# Altium PCB FPGA_Rack_v1_0.PcbDoc (part 3 of 5)
Units mil, origin at the board's own origin, x right, y up, seen from the top; angles counter-clockwise.
Board outline 6299.21 x 3937.01 mil, 8 copper layers (Top Layer, Top, Internal Plane 2, Vcc 3.3V, Internal Plane 1, Gnd, Mid-Layer 1, SIG1, Mid-Layer 2, SIG3, Mid-Layer 3, SIG2, Mid-Layer 4, SIG4, Bottom Layer, Bottom), stack 74.2 mil thick; 215 components, 379 nets, 1713 pads, 1076 vias.
Unrouted connection lines stored in the file: 1.
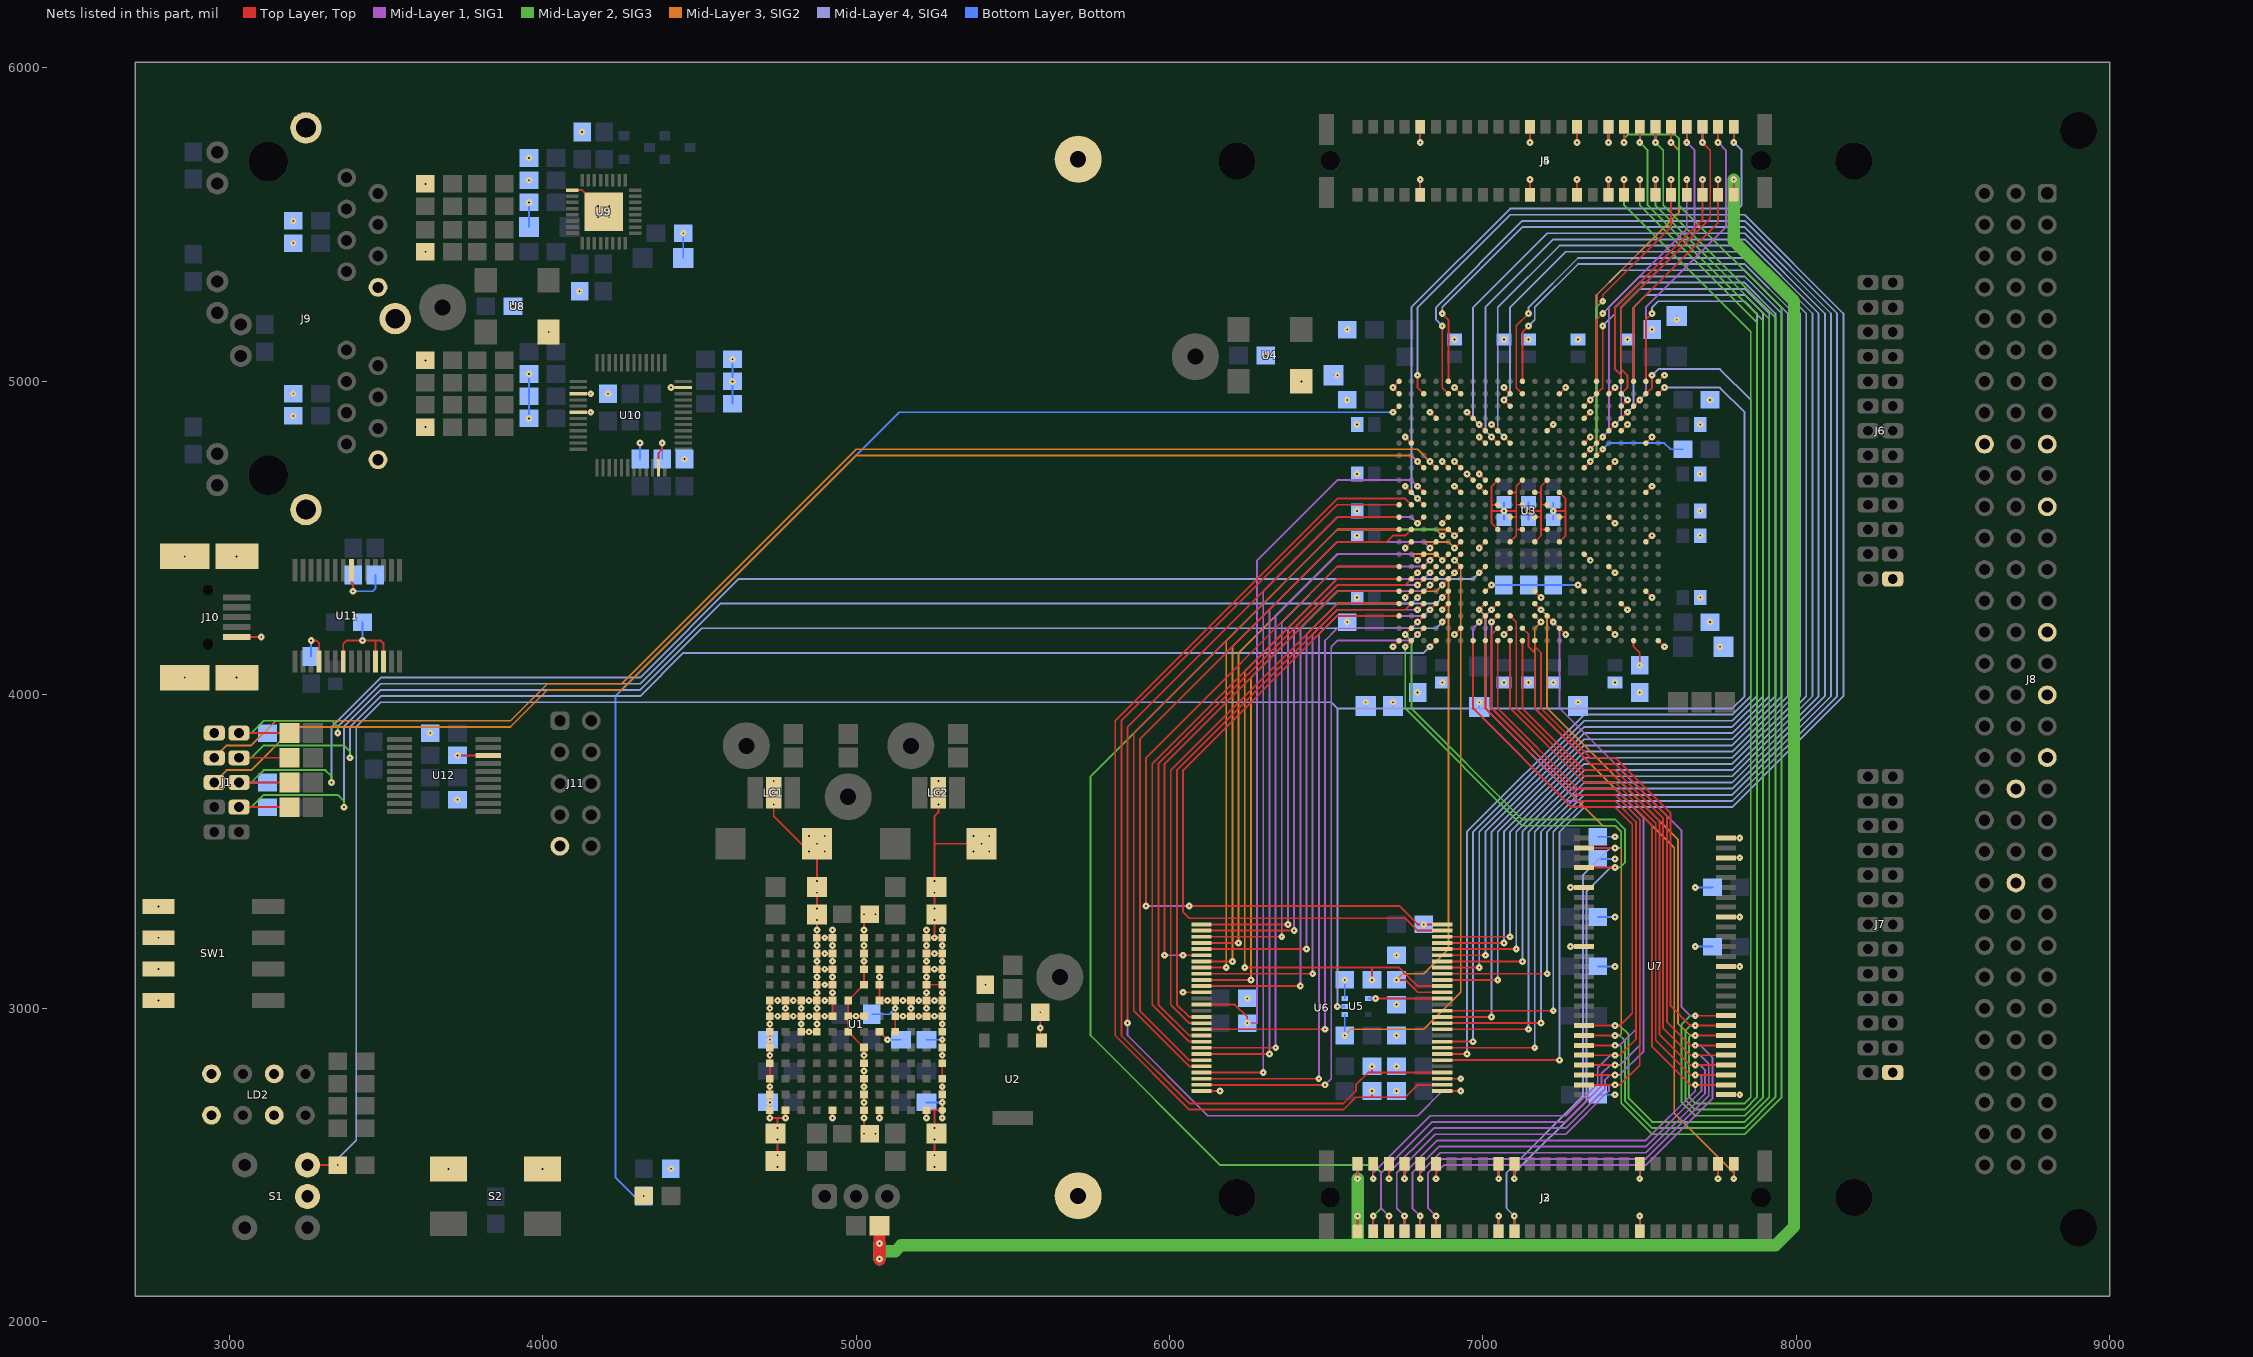
[diagram p9: the nets of this part, all layers, seen from the top]

## Via types
v1: diameter 21.65, hole 5.91, Top Layer, Top to Bottom Layer, Bottom, 1076 vias

## Nets (pads, with @x,y where several pads share a name; then routed paths per layer and width w, separated by ;. In a path a pad name is that pad's centre, name@x,y a point inside that pad or via, vN(x,y) a via of type N, cw(c..) or ccw(c..) an arc to the next point about the centre after c; other vN are vias at no path point) (continued)
FB2: R5.2 U1.54 | length 79.1
  Top Layer, Top w5.91: U1.54@5075,2925 v1(5100,2900)
  Bottom Layer, Bottom w5.91: v1(5100,2900) R5.2@5143.75,2900
FLASH_ADV_N: R23.2 U3.G20 U6.46 | length 2348.1
  Top Layer, Top w5.91: v1(6240.16,3129.92) 6645.67,3129.92 ; v1(6645.67,3090.55) 6645.67,3129.92 ; v1(6791.34,4389.76) U3.G20@6811.02,4409.45 ; U6.46@6870.08,3070.87 6791.34,3070.87 6732.28,3129.92 6645.67,3129.92
  Mid-Layer 3, SIG2 w5.91: v1(6240.16,3129.92) 6240.16,4074.8 6535.43,4370.08 6771.65,4370.08 v1(6791.34,4389.76)
FLASH_CE_N: R22.1 U3.M21 U6.30 | length 3444
  Top Layer, Top w5.91: v1(6645.67,2736.22) 6645.67,2716.54 ; U3.M21@6771.65,4606.3 6751.97,4625.98 6535.43,4625.98 5826.77,3917.32 5826.77,2913.39 6062.99,2677.17 6555.12,2677.17 6594.49,2716.54 6645.67,2716.54 ; U6.30@6870.08,2755.91 6791.34,2755.91 6751.97,2716.54 6645.67,2716.54
FLASH_CLK: R26.1 U3.G17 U6.45 | length 1604.9
  Top Layer, Top w5.91: v1(6724.41,3090.55) 6751.97,3090.55 6791.34,3051.18 U6.45@6870.08,3051.18 ; v1(6909.45,4389.76) U3.G17@6929.13,4409.45
  Mid-Layer 3, SIG2 w5.91: v1(6724.41,3090.55) 6744.09,3110.24 6811.02,3110.24 6889.76,3188.98 6889.76,4370.08 v1(6909.45,4389.76)
FLASH_FPGA_RESET_N: R21.1 U3.H17 U5.1 | length 1908
  Top Layer, Top w5.91: v1(6909.45,4429.13) U3.H17@6929.13,4448.82
  Mid-Layer 3, SIG2 w5.91: v1(6559.06,2913.39) 6578.74,2933.07 6811.02,2933.07 6929.13,3051.18 6929.13,4409.45 v1(6909.45,4429.13)
  Bottom Layer, Bottom w5.91: v1(6559.06,2913.39) U5.1@6559.06,2980.32
FLASH_OE_N: R24.1 U3.M22 U6.32 | length 3360.4
  Top Layer, Top w5.91: v1(6645.67,2814.96) 6645.67,2795.28 ; U3.M22@6732.28,4606.3 6535.43,4606.3 5846.46,3917.32 5846.46,2913.39 6062.99,2696.85 6555.12,2696.85 6594.49,2736.22 6594.49,2755.91 6633.86,2795.28 6645.67,2795.28 ; U6.32@6870.08,2795.28 6645.67,2795.28
FLASH_RST_N: U5.4 U6.44 | length 236.2
  Top Layer, Top w5.91: v1(6657.48,3031.5) U6.44@6870.08,3031.5
  Bottom Layer, Bottom w5.91: U5.4@6633.86,3031.5 v1(6657.48,3031.5)
FLASH_WAIT: R27.1 U3.G22 U6.56 | length 2501.6
  Top Layer, Top w5.91: v1(5925.2,3326.77) 5925.2,3799.21 6535.43,4409.45 U3.G22@6732.28,4409.45 ; v1(6062.99,3326.77) 6732.28,3326.77 6791.34,3267.72 v1(6811.02,3267.72) U6.56@6870.08,3267.72
  Mid-Layer 1, SIG1 w5.91: v1(5925.2,3326.77) v1(6062.99,3326.77)
FLASH_WE_N: R25.1 U3.N20 U6.14 | length 2343.3
  Top Layer, Top w5.91: U6.14@6102.36,3011.81 6208.66,3011.81 6248.03,2972.44 v1(6248.03,2952.76) ; v1(6791.34,4665.35) U3.N20@6811.02,4645.67
  Mid-Layer 1, SIG1 w5.91: v1(6248.03,2952.76) 6279.53,2952.76 6279.53,4429.13 6535.43,4685.04 6771.65,4685.04 v1(6791.34,4665.35)
FPGA_DONE: LD1.2 R13.2 U3.Y22 | length 4533.7
  Top Layer, Top w5.91: v1(6712.6,4901.57) U3.Y22@6732.28,4921.26
  Bottom Layer, Bottom w5.91: v1(4322.83,2401.57) 4291.34,2401.57 4232.28,2460.63 4232.28,3996.06 5137.8,4901.57 v1(6712.6,4901.57)
FPGA_INIT_B: R9.2 U3.T6 | length 300.1
  Top Layer, Top w5.91: U3.T6@7362.2,4763.78 v1(7381.89,4783.46)
  Bottom Layer, Bottom w5.91: v1(7381.89,4783.46) 7401.57,4803.15 7578.74,4803.15 7598.43,4783.46 R9.2@7637.8,4783.46
FPGA_JTAG_TCK: J1.5 JP9.2 R11.1 U3.G15 | length 4661.5
  Top Layer, Top w5.91: J1.5@3031.5,3720.47 JP9.2@3192.72,3720.47 ; v1(6988.19,4389.76) U3.G15@7007.87,4409.45
  Mid-Layer 2, SIG3 w5.91: J1.5@3031.5,3720.47 3070.87,3720.47 3110.24,3759.84 3307.09,3759.84 3326.77,3740.16 v1(3326.77,3720.47)
  Mid-Layer 4, SIG4 w5.91: v1(3326.77,3720.47) 3326.77,3897.64 3484.25,4055.12 4311.02,4055.12 4625.98,4370.08 6968.5,4370.08 v1(6988.19,4389.76)
  Bottom Layer, Bottom w5.91: J1.5@3031.5,3720.47 R11.1@3122.05,3720.47
FPGA_JTAG_TDI: J1.9 JP11.2 R12.1 U3.E18 | length 4353.3
  Top Layer, Top w5.91: J1.9@3031.5,3877.95 JP11.2@3192.72,3877.95 ; v1(6870.08,4311.02) U3.E18@6889.76,4330.71
  Mid-Layer 2, SIG3 w5.91: J1.9@3031.5,3877.95 3070.87,3877.95 3110.24,3917.32 3326.77,3917.32 3346.46,3897.64 v1(3346.46,3877.95)
  Mid-Layer 4, SIG4 w5.91: v1(3346.46,3877.95) 3346.46,3897.64 3484.25,4035.43 4311.02,4035.43 4566.93,4291.34 6850.39,4291.34 v1(6870.08,4311.02)
  Bottom Layer, Bottom w5.91: J1.9@3031.5,3877.95 R12.1@3122.05,3877.95
FPGA_JTAG_TDO: J1.7 JP10.2 U3.A19 | length 4236.8
  Top Layer, Top w5.91: J1.7@3031.5,3799.21 JP10.2@3192.72,3799.21 ; v1(6830.71,4153.54) U3.A19@6850.39,4173.23
  Mid-Layer 2, SIG3 w5.91: J1.7@3031.5,3799.21 3070.87,3799.21 3110.24,3838.58 3366.14,3838.58 3385.83,3818.9 v1(3385.83,3799.21)
  Mid-Layer 4, SIG4 w5.91: v1(3385.83,3799.21) 3385.83,3897.64 3484.25,3996.06 4311.02,3996.06 4448.82,4133.86 6811.02,4133.86 v1(6830.71,4153.54)
FPGA_JTAG_TMS: J1.3 JP8.2 R10.1 U3.C18 | length 4556.9
  Top Layer, Top w5.91: J1.3@3031.5,3641.73 JP8.2@3192.72,3641.73 ; v1(6870.08,4232.28) U3.C18@6889.76,4251.97
  Mid-Layer 2, SIG3 w5.91: J1.3@3031.5,3641.73 3070.87,3641.73 3110.24,3681.1 3346.46,3681.1 3366.14,3661.42 v1(3366.14,3641.73)
  Mid-Layer 4, SIG4 w5.91: v1(3366.14,3641.73) 3366.14,3897.64 3484.25,4015.75 4311.02,4015.75 4507.87,4212.6 6850.39,4212.6 v1(6870.08,4232.28)
  Bottom Layer, Bottom w5.91: J1.3@3031.5,3641.73 R10.1@3122.05,3641.73
GND: C1.1 C2.1 C3.1 C4.1 C5.1 C6.1 C7.1 C8.1 C9.1 C10.1 C11.1 C12.1 C13.1 C14.1 C15.MINUS C16.MINUS C17.1 C18.1 C19.1 C20.1 C21.1 C22.1 C23.1 C24.1 C25.1 C26.1 C27.1 C28.1 C29.1 C30.1 C31.1 C32.1 C33.1 C34.1 C35.1 C36.1 C37.1 C38.1 C39.1 C40.1 C41.1 C42.1 C43.1 C44.1 C45.1 C46.1 C47.1 C48.1 C49.1 C50.1 C51.1 C52.1 C53.1 C54.1 C55.1 C56.1 C57.1 C58.1 C59.1 C60.1 C61.1 C62.1 C63.1 C64.1 C65.1 C66.1 C67.1 C68.1 C69.1 C70.1 C71.1 C72.1 C73.1 C74.1 C75.1 C76.2 C77.2 C78.1 C79.1 C80.1 C81.2 C82.1 C83.1 C84.2 C85.2 C86.1 C87.1 C88.1 C89.2 C90.2 C91.1 C92.1 C93.1 C94.2 C95.2 C96.1 C97.1 C98.1 C99.1 C100.1 C101.1 C102.1 C105.2 C106.2 C107.1 J1.10 J2.a10 J2.a19 J2.b10 J2.b19 J2.b24 J3.a10 J3.a19 J3.b10 J3.b19 J3.b24 J4.a5 J4.a12 J4.a15 J4.a17 J4.b5 J4.b12 J4.b15 J4.b17 J5.a5 J5.a12 J5.a15 J5.a17 J5.b5 J5.b12 J5.b15 J5.b17 J6.26 J7.26 J8.9a J8.9c J8.11a J8.15a J8.17a J8.19a J8.20b J8.23b J9.8 J9.20 J9.25 J9.26 J9.27 J10.5 J10.6 J10.7 J10.8 J10.9 J11.9 LC1.2 LC2.2 LD2.2 LD2.4 LD2.6 LD2.8 PT1.1 PT6.1 R1.1 R5.1 R6.1 R7.1 R14.2 R23.1 R39.1 R48.1 S1.C S2.1 S2.2 SW1.1 SW1.2 SW1.3 SW1.4 U1.1 U1.2 U1.3 U1.4 U1.5 U1.6 U1.7 U1.8 U1.9 U1.10 U1.11 U1.12 U1.13 U1.19 U1.20 U1.21 U1.22 U1.23 U1.24 U1.31 U1.32 U1.42 U1.43 U1.44 U1.49 U1.56 U1.57 U1.58 U1.61 U1.62 U1.63 U1.64 U1.65 U1.67 U1.69 U1.70 U1.71 U1.72 U1.78 U1.79 U1.80 U1.85 U1.91 U1.92 U1.93 U1.94 U1.95 U1.96 U1.102 U1.103 U1.104 U1.105 U1.106 U1.107 U1.108 U1.114 U1.115 U1.116 U1.121 U1.127 U1.128 U1.133 U1.134 U1.135 U1.136 U1.137 U1.138 U1.139 U1.140 U2.2 U3.A1 U3.A22 U3.AA5 U3.AA9 U3.AA13 U3.AA17 U3.AA22 U3.AB1 U3.AB22 U3.B5 U3.B9 U3.B13 U3.B17 U3.D4 U3.D18 U3.E2 U3.E7 U3.E11 U3.E15 U3.E21 U3.G5 U3.G18 U3.H7 U3.J2 U3.J9 U3.J11 U3.J13 U3.J15 U3.J21 U3.K10 U3.K12 U3.K14 U3.L5 U3.L9 U3.L11 U3.L13 U3.L18 U3.M10 U3.M12 U3.M14 U3.N2 U3.N9 U3.N11 U3.N13 U3.N15 U3.N17 U3.N21 U3.P10 U3.P12 U3.P14 U3.P15 U3.P16 U3.R5 U3.R17 U3.R18 U3.U2 U3.U7 U3.U15 U3.U21 U3.V4 U3.V10 U3.V14 U3.W7 U3.W16 U3.W19 U4.2 U5.3 U6.12 U6.28 U6.31 U7.6 U7.12 U7.28 U7.41 U7.46 U7.52 U7.54 U8.2 U9.1 U9.33 U10.15 U10.18 U10.35 U10.47 U11.7 U11.18 U11.21 U11.25 U11.26 U12.18 | length 13745.6
  Top Layer, Top w5.91: J10.7@2858.27,4054.13 v1(2858.27,4055.12) ; v1(2858.27,4440.94) J10.9@2858.27,4441.93 ; v1(3023.62,4055.12) 3024.61,4054.13 J10.6@3025.59,4054.13 ; v1(3023.62,4440.94) 3024.61,4441.93 J10.8@3025.59,4441.93 ; J10.5@3024.61,4185.04 v1(3102.36,4185.04) ; v1(3261.81,4173.23) 3279.53,4173.23 3287.4,4165.35 U11.18@3287.4,4106.3 ; U11.21@3364.17,4106.3 3364.17,4163.39 3374.02,4173.23 v1(3425.2,4173.23) 3466.54,4173.23 ; U11.7@3389.76,4397.64 3389.76,4358.27 3395.67,4352.36 v1(3395.67,4330.71) ; U11.25@3466.54,4106.3 3466.54,4173.23 ; U11.26@3492.13,4106.3 3492.13,4165.35 3484.25,4173.23 3466.54,4173.23 ; v1(3728.35,3807.09) U12.18@3826.77,3807.09 ; U8.2@4018.9,5157.48 v1(4019.68,5157.48) ; U9.1@4094.49,5610.24 4125.98,5610.24 v1(4177.17,5559.06) U9.33@4194.88,5541.34 ; U10.18@4114.17,4901.57 v1(4153.54,4901.57) ; U10.15@4114.17,4960.63 v1(4153.54,4960.63) ; v1(4177.17,5523.62) U9.33@4194.88,5541.34 ; v1(4212.6,5523.62) U9.33@4194.88,5541.34 ; v1(4212.6,5559.06) U9.33@4194.88,5541.34 ; U10.35@4370.08,4724.41 4370.08,4771.65 4381.89,4783.46 v1(4381.89,4803.15) ; v1(4409.45,4980.31) U10.47@4448.82,4980.31 ; v1(4737.5,3725) v1(4737.5,3687.5) v1(4737.5,3650) 4737.5,3612.5 4825,3525 ; C1.1@4743.75,2512.5 C1.1@4750,2512.5 ; C4.1@4743.75,2600 C4.1@4750,2600 ; v1(4750,2493.75) C1.1@4750,2512.5 ; U1.121@4775,2675 v1(4775,2650) 4750,2650 ; v1(4850,3550) v1(4875,3525) ; v1(4900,3500) v1(4875,3525) ; v1(4900,3550) v1(4875,3525) ; v1(4925,2650) U1.85@4925,2675 ; v1(4925,3250) U1.96@4925,3225 ; U1.67@5025,2975 v1(5000,2975) U1.79@4975,2975 ; v1(5062.5,2600) C3.1@5043.75,2600 v1(5025,2600) v1(5025,2650) U1.61@5025,2675 v1(5025,2700) U1.62@5025,2725 v1(5025,2750) U1.63@5025,2775 v1(5025,2800) U1.64@5025,2825 v1(5025,2850) U1.65@5025,2875 U1.78@4975,2925 U1.79@4975,2975 ; v1(5062.5,3300) C10.1@5043.75,3300 v1(5025,3300) v1(5025,3250) U1.72@5025,3225 v1(5025,3200) U1.71@5025,3175 v1(5025,3150) U1.70@5025,3125 U1.69@5025,3075 U1.80@4975,3025 U1.79@4975,2975 ; v1(5075,2650) U1.49@5075,2675 ; U1.58@5075,3125 v1(5075,3100) U1.57@5075,3075 U1.56@5075,3025 v1(5100,3025) U1.44@5125,3025 ; U1.42@5125,2925 U1.43@5125,2975 ; v1(5225,2650) U1.13@5225,2675 5250,2675 ; v1(5225,3250) U1.24@5225,3225 ; v1(5250,2493.75) C2.1@5250,2512.5 ; C2.1@5256.25,2512.5 C2.1@5250,2512.5 ; C5.1@5256.25,2600 C5.1@5250,2600 ; C12.1@5256.25,3300 C12.1@5250,3300 ; C14.1@5256.25,3387.5 C14.1@5250,3387.5 ; v1(5262.5,3725) v1(5262.5,3687.5) v1(5262.5,3650) 5262.5,3625 5250,3612.5 5250,3525 ; v1(5275,2650) U1.1@5275,2675 ; v1(5275,3250) U1.12@5275,3225 ; v1(5375,3500) v1(5400,3525) ; v1(5375,3550) v1(5400,3525) ; v1(5425,3500) v1(5400,3525) ; v1(5425,3550) v1(5400,3525) ; v1(5587.5,2987.5) v1(5587.5,2937.5) 5587.5,2901.5 U2.2@5591,2898 ; v1(6043.31,3051.18) U6.12@6102.36,3051.18 ; U6.28@6102.36,2736.22 v1(6161.42,2736.22) ; U4.2@6420.47,5000 v1(6421.26,5000) ; v1(6712.6,4153.54) U3.A22@6732.28,4173.23 ; U3.AA22@6732.28,4960.63 v1(6712.6,4980.31) U3.AB22@6732.28,5000 ; v1(6751.97,4311.02) U3.E21@6771.65,4330.71 ; v1(6751.97,4468.5) U3.J21@6771.65,4488.19 ; v1(6751.97,4665.35) U3.N21@6771.65,4645.67 ; v1(6751.97,4822.83) U3.U21@6771.65,4803.15 ; J4.a5@6800,5595.23 v1(6800,5643.75) ; v1(6800,5762.5) J4.b5@6800,5811.77 ; v1(6830.71,4901.57) U3.W19@6850.39,4881.89 ; U6.31@6870.08,2775.59 v1(6929.13,2775.59) ; v1(6870.08,4271.65) U3.D18@6889.76,4291.34 ; v1(6870.08,4389.76) U3.G18@6889.76,4409.45 ; v1(6870.08,4547.24) U3.L18@6889.76,4566.93 ; v1(6870.08,4744.09) U3.R18@6889.76,4724.41 ; v1(6909.45,4192.91) U3.B17@6929.13,4212.6 ; v1(6909.45,4665.35) U3.N17@6929.13,4645.67 ; v1(6909.45,4744.09) U3.R17@6929.13,4724.41 ; v1(6909.45,4980.31) U3.AA17@6929.13,4960.63 ; v1(6948.82,4704.72) U3.P16@6968.5,4685.04 ; v1(6948.82,4901.57) U3.W16@6968.5,4881.89 ; v1(6988.19,4468.5) U3.J15@7007.87,4488.19 ; v1(6988.19,4665.35) U3.N15@7007.87,4645.67 ; v1(6988.19,4704.72) U3.P15@7007.87,4685.04 ; v1(6988.19,4822.83) U3.U15@7007.87,4803.15 ; U3.E15@7007.87,4330.71 v1(7027.56,4350.39) ; v1(7027.56,4862.2) U3.V14@7047.24,4842.52 ; U3.K14@7047.24,4527.56 7027.56,4547.24 7027.56,4586.61 ; U3.M14@7047.24,4606.3 7027.56,4606.3 ; U3.P14@7047.24,4685.04 7027.56,4665.35 7027.56,4606.3 ; J2.a10@7050,2288.23 v1(7050,2337.5) ; v1(7050,2456.25) J2.b10@7050,2504.77 ; v1(7066.93,4192.91) U3.B13@7086.61,4212.6 ; v1(7066.93,4980.31) U3.AA13@7086.61,4960.63 ; U3.J13@7086.61,4488.19 7106.3,4507.87 7106.3,4527.56 ; U3.L13@7086.61,4566.93 7106.3,4566.93 ; U3.N13@7086.61,4645.67 7106.3,4645.67 ; U3.K12@7125.98,4527.56 7106.3,4527.56 ; U3.M12@7125.98,4606.3 7106.3,4606.3 ; U3.P12@7125.98,4685.04 7106.3,4665.35 7106.3,4645.67 ; v1(7145.67,4586.61) 7185.04,4586.61 ; J4.a12@7150,5595.23 v1(7150,5643.75) ; v1(7150,5762.5) J4.b12@7150,5811.77 ; U3.E11@7165.35,4330.71 v1(7185.04,4311.02) ; U3.J11@7165.35,4488.19 7185.04,4507.87 7185.04,4527.56 ; U3.L11@7165.35,4566.93 7185.04,4566.93 ; U3.N11@7165.35,4645.67 7185.04,4645.67 ; U3.K10@7204.72,4527.56 7185.04,4527.56 ; U3.M10@7204.72,4606.3 7185.04,4606.3 ; U3.P10@7204.72,4685.04 7185.04,4665.35 7185.04,4645.67 ; U3.V10@7204.72,4842.52 v1(7224.41,4862.2) ; v1(7224.41,4586.61) 7263.78,4586.61 ; U3.B9@7244.09,4212.6 v1(7263.78,4192.91) ; U3.J9@7244.09,4488.19 7263.78,4507.87 7263.78,4566.93 ; U3.L9@7244.09,4566.93 7263.78,4566.93 ; U3.N9@7244.09,4645.67 7263.78,4625.98 7263.78,4586.61 ; U3.AA9@7244.09,4960.63 v1(7263.78,4980.31) ; v1(7279.53,3196.85) U7.12@7322.83,3196.85 ; v1(7279.53,3385.83) U7.6@7322.83,3385.83 ; J4.a15@7300,5595.23 v1(7300,5643.75) ; v1(7300,5762.5) J4.b15@7300,5811.77 ; v1(7303.15,4350.39) U3.E7@7322.83,4330.71 ; U3.H7@7322.83,4448.82 v1(7342.52,4429.13) ; U3.U7@7322.83,4803.15 v1(7342.52,4822.83) ; U3.W7@7322.83,4881.89 v1(7342.52,4901.57) ; J4.a17@7400,5595.23 v1(7400,5643.75) ; v1(7400,5762.5) J4.b17@7400,5811.77 ; U3.B5@7401.57,4212.6 v1(7421.26,4192.91) ; U3.G5@7401.57,4409.45 v1(7421.26,4389.76) ; U3.L5@7401.57,4566.93 v1(7421.26,4547.24) ; U3.R5@7401.57,4724.41 v1(7421.26,4744.09) ; U3.AA5@7401.57,4960.63 v1(7421.26,4980.31) ; U3.D4@7440.94,4291.34 v1(7460.63,4271.65) ; U3.V4@7440.94,4842.52 v1(7460.63,4862.2) ; J2.a19@7500,2288.23 v1(7500,2337.5) ; v1(7500,2456.25) J2.b19@7500,2504.77 ; U3.E2@7519.69,4330.71 v1(7539.37,4311.02) ; U3.J2@7519.69,4488.19 v1(7539.37,4507.87) ; U3.N2@7519.69,4645.67 v1(7539.37,4665.35) ; U3.U2@7519.69,4803.15 v1(7539.37,4822.83) ; U3.A1@7559.06,4173.23 v1(7578.74,4153.54) ; U3.AB1@7559.06,5000 v1(7578.74,5019.69) ; v1(7750,2456.25) J2.b24@7750,2504.77 ; U7.28@7775.59,2724.41 v1(7818.9,2724.41) ; U7.41@7775.59,3133.86 v1(7818.9,3133.86) ; U7.46@7775.59,3291.34 v1(7818.9,3291.34) ; U7.52@7775.59,3480.32 v1(7818.9,3480.32) ; U7.54@7775.59,3543.31 v1(7818.9,3543.31) ; U1.139@4725,2975 v1(4725,3000) U1.140@4725,3025 v1(4750,3025) U1.128@4775,3025 ; U1.139@4725,2975 v1(4725,2950) U1.138@4725,2925 v1(4725,2900) U1.137@4725,2875 v1(4725,2850) U1.136@4725,2825 U1.135@4725,2775 v1(4725,2750) U1.134@4725,2725 v1(4725,2700) U1.133@4725,2675 v1(4725,2650) 4750,2650 ; U1.139@4725,2975 v1(4750,2975) U1.127@4775,2975 ; C1.1@4750,2512.5 v1(4750,2531.25) v1(4750,2581.25) C4.1@4750,2600 ; C4.1@4750,2600 v1(4750,2618.75) 4750,2650 ; U1.127@4775,2975 v1(4800,2975) U1.115@4825,2975 ; U1.127@4775,2975 v1(4775,3000) U1.128@4775,3025 ; U1.128@4775,3025 v1(4800,3025) U1.116@4825,3025 ; U1.115@4825,2975 v1(4825,3000) U1.116@4825,3025 ; U1.115@4825,2975 v1(4825,2950) U1.114@4825,2925 v1(4850,2925) U1.102@4875,2925 v1(4875,2950) U1.103@4875,2975 ; U1.115@4825,2975 v1(4850,2975) U1.103@4875,2975 ; U1.116@4825,3025 v1(4850,3025) U1.104@4875,3025 ; 4825,3525 v1(4850,3500) ; 4825,3525 v1(4875,3525) ; v1(4850,3500) 4875,3475 v1(4875,3406.25) C13.1@4875,3387.5 v1(4875,3368.75) v1(4875,3318.75) C11.1@4875,3300 v1(4875,3281.25) v1(4875,3250) U1.108@4875,3225 ; v1(4850,3500) v1(4875,3525) ; U1.103@4875,2975 v1(4875,3000) U1.104@4875,3025 ; U1.103@4875,2975 v1(4900,2975) U1.91@4925,2975 U1.92@4925,3025 ; U1.104@4875,3025 v1(4900,3025) U1.92@4925,3025 ; U1.104@4875,3025 v1(4875,3050) U1.105@4875,3075 ; U1.105@4875,3075 v1(4900,3075) U1.93@4925,3075 ; U1.105@4875,3075 v1(4875,3100) U1.106@4875,3125 ; U1.106@4875,3125 v1(4900,3125) U1.94@4925,3125 ; U1.106@4875,3125 v1(4875,3150) U1.107@4875,3175 ; U1.107@4875,3175 v1(4900,3175) U1.95@4925,3175 ; U1.107@4875,3175 v1(4875,3200) U1.108@4875,3225 ; U1.108@4875,3225 v1(4900,3225) U1.96@4925,3225 ; U1.92@4925,3025 v1(4925,3050) U1.93@4925,3075 ; U1.93@4925,3075 v1(4925,3100) U1.94@4925,3125 ; U1.94@4925,3125 v1(4925,3150) U1.95@4925,3175 ; U1.95@4925,3175 v1(4925,3200) U1.96@4925,3225 ; U1.43@5125,2975 v1(5125,3000) U1.44@5125,3025 ; U1.43@5125,2975 v1(5150,2975) U1.31@5175,2975 ; U1.44@5125,3025 v1(5150,3025) U1.32@5175,3025 ; U1.31@5175,2975 v1(5175,3000) U1.32@5175,3025 ; U1.31@5175,2975 v1(5200,2975) U1.19@5225,2975 ; U1.32@5175,3025 v1(5200,3025) U1.20@5225,3025 ; U1.19@5225,2975 v1(5225,3000) U1.20@5225,3025 ; U1.19@5225,2975 v1(5250,2975) U1.7@5275,2975 ; U1.20@5225,3025 v1(5250,3025) U1.8@5275,3025 ; U1.20@5225,3025 v1(5225,3050) U1.21@5225,3075 ; U1.21@5225,3075 U1.9@5275,3075 ; U1.21@5225,3075 v1(5225,3100) U1.22@5225,3125 ; U1.22@5225,3125 v1(5250,3125) U1.10@5275,3125 ; U1.22@5225,3125 v1(5225,3150) U1.23@5225,3175 ; U1.23@5225,3175 v1(5250,3175) U1.11@5275,3175 ; U1.23@5225,3175 v1(5225,3200) U1.24@5225,3225 ; U1.24@5225,3225 v1(5250,3225) ; C2.1@5250,2512.5 v1(5250,2531.25) v1(5250,2581.25) C5.1@5250,2600 ; C5.1@5250,2600 v1(5250,2618.75) 5250,2675 ; 5250,2675 U1.1@5275,2675 ; v1(5250,3225) U1.12@5275,3225 ; v1(5250,3225) v1(5250,3281.25) C12.1@5250,3300 ; C12.1@5250,3300 v1(5250,3318.75) v1(5250,3368.75) C14.1@5250,3387.5 ; C14.1@5250,3387.5 v1(5250,3406.25) 5250,3525 ; 5250,3525 v1(5400,3525) ; U1.1@5275,2675 v1(5275,2700) U1.2@5275,2725 v1(5275,2750) U1.3@5275,2775 U1.4@5275,2825 v1(5275,2850) U1.5@5275,2875 v1(5275,2900) U1.6@5275,2925 v1(5275,2950) U1.7@5275,2975 ; U1.7@5275,2975 v1(5275,3000) U1.8@5275,3025 ; U1.8@5275,3025 v1(5275,3050) U1.9@5275,3075 ; U1.9@5275,3075 v1(5275,3100) U1.10@5275,3125 ; U1.10@5275,3125 v1(5275,3150) U1.11@5275,3175 ; U1.11@5275,3175 v1(5275,3200) U1.12@5275,3225 ; 7027.56,4586.61 7027.56,4606.3 ; 7027.56,4586.61 v1(7066.93,4586.61) 7106.3,4586.61 ; 7106.3,4527.56 7106.3,4566.93 ; 7106.3,4566.93 7106.3,4586.61 ; 7106.3,4586.61 7106.3,4606.3 ; 7106.3,4606.3 7106.3,4645.67 ; 7185.04,4527.56 7185.04,4566.93 ; 7185.04,4566.93 7185.04,4586.61 ; 7185.04,4586.61 7185.04,4606.3 ; 7185.04,4606.3 7185.04,4645.67 ; 7263.78,4566.93 7263.78,4586.61
  Bottom Layer, Bottom w5.91: C102.1@3261.81,4122.05 v1(3261.81,4173.23) ; C100.1@3395.67,4381.89 v1(3395.67,4330.71) 3458.66,4330.71 3466.54,4338.58 C101.1@3466.54,4381.89 ; v1(3425.2,4173.23) C99.1@3425.2,4232.28 ; v1(3956.69,4881.89) C86.1@3956.69,4952.76 v1(3956.69,5023.62) ; C80.1@3956.69,5492.13 v1(3956.69,5570.87) ; C98.1@4311.02,4751.97 v1(4311.02,4803.15) ; C97.1@4381.89,4751.97 v1(4381.89,4803.15) ; C83.1@4448.82,5393.7 v1(4448.82,5472.44) ; C93.1@4606.3,4929.13 v1(4606.3,5000) v1(4606.3,5070.87) ; C9.1@4718.75,2700 v1(4725,2700) ; R6.1@4718.75,2900 v1(4725,2900) ; R1.1@5050,2981.25 5106.25,2981.25 v1(5125,3000) ; C8.1@5225,2700 v1(5275,2700) ; R5.1@5225,2900 v1(5275,2900) ; C26.1@6523.62,5019.69 v1(6535.43,5019.69) ; U5.3@6559.06,3031.5 v1(6559.06,3090.55) ; C24.1@6625.98,3964.57 v1(6625.98,3976.38) ; C25.1@6712.6,3964.57 v1(6712.6,3976.38) ; J5.a5@6800,5595.23 v1(6800,5643.75) ; v1(6800,5762.5) J5.b5@6800,5811.77 ; C23.1@6988.19,3960.63 v1(6988.19,3976.38) ; v1(7027.56,4350.39) C29.1@7066.93,4350.39 C36.1@7145.67,4350.39 C34.1@7224.41,4350.39 v1(7303.15,4350.39) ; J3.a10@7050,2288.23 v1(7050,2337.5) ; v1(7050,2456.25) J3.b10@7050,2504.77 ; C37.1@7066.93,4559.06 v1(7066.93,4586.61) C52.1@7066.93,4614.17 ; C42.1@7145.67,4559.06 v1(7145.67,4586.61) C57.1@7145.67,4614.17 ; J5.a12@7150,5595.23 v1(7150,5643.75) ; v1(7150,5762.5) J5.b12@7150,5811.77 ; C47.1@7224.41,4559.06 v1(7224.41,4586.61) C58.1@7224.41,4614.17 ; J5.a15@7300,5595.23 v1(7300,5643.75) ; v1(7300,5762.5) J5.b15@7300,5811.77 ; C28.1@7303.15,3964.57 v1(7303.15,3976.38) ; C71.1@7366.14,2724.41 v1(7421.26,2724.41) ; C70.1@7366.14,3133.86 v1(7421.26,3133.86) ; C69.1@7366.14,3291.34 v1(7421.26,3291.34) ; C68.1@7366.14,3476.38 v1(7421.26,3476.38) ; C67.1@7366.14,3547.24 v1(7421.26,3547.24) ; J5.a17@7400,5595.23 v1(7400,5643.75) ; v1(7400,5762.5) J5.b17@7400,5811.77 ; J3.a19@7500,2288.23 v1(7500,2337.5) ; v1(7500,2456.25) J3.b19@7500,2504.77 ; v1(7618.11,5196.85) C27.1@7618.11,5208.66 ; v1(7677.17,3196.85) C72.1@7732.28,3196.85 ; v1(7677.17,3385.83) C73.1@7732.28,3385.83 ; v1(7750,2456.25) J3.b24@7750,2504.77 ; v1(7755.91,4153.54) C17.1@7767.72,4153.54
  other v1: 3700,2487.5 4000,2487.5 4409.45,2488.19 6724.41,2736.22 6724.41,2814.96 6724.41,2913.39 6724.41,3011.81 2775,3025 6248.03,3031.5 5412.5,3075 2775,3125 6724.41,3169.29 2775,3225 2775,3325 3728.35,3665.35 3641.73,3877.95 6791.34,4007.87 7500,4007.87 6870.08,4039.37 7066.93,4039.37 7145.67,4039.37 7224.41,4039.37 7421.26,4039.37 6566.93,4232.28 7724.41,4232.28 6598.43,4311.02 7692.91,4311.02 6598.43,4507.87 7692.91,4507.87 6598.43,4586.61 7692.91,4586.61 6598.43,4704.72 7692.91,4704.72 4452.76,4751.97 3625.98,4854.33 6598.43,4862.2 7692.91,4862.2 3204.72,4889.76 6566.93,4940.94 7724.41,4940.94 3204.72,4960.63 4208.66,4960.63 3625.98,5066.93 6307.09,5082.68 6909.45,5133.86 7066.93,5133.86 7145.67,5133.86 7303.15,5133.86 7460.63,5133.86 6566.93,5165.35 7539.37,5165.35 3905.51,5240.16 4118.11,5287.4 3625.98,5413.39 3204.72,5440.94 3204.72,5511.81 3625.98,5629.92 3956.69,5641.73 3956.69,5712.6 4125.98,5795.28
HARDRESET_N: R15.1 S1.NO U3.AA1 U5.2 | length 8201
  Top Layer, Top w5.91: S1.NO@3250,2500 v1(3346.46,2500) ; U3.AA1@7559.06,4960.63 v1(7578.74,4980.31)
  Mid-Layer 4, SIG4 w5.91: v1(3346.46,2500) 3346.46,2519.68 3405.51,2578.74 3405.51,3897.64 3484.25,3976.38 6515.75,3976.38 6535.43,3956.69 ; v1(6535.43,3005.91) 6535.43,3956.69 ; v1(7578.74,4980.31) 7755.91,4980.31 7834.65,4901.57 7834.65,3996.06 7795.28,3956.69 6535.43,3956.69
  Bottom Layer, Bottom w5.91: v1(6535.43,3005.91) U5.2@6559.06,3005.91
HSWAPEN: R7.2 U3.A3 | length 86.9
  Top Layer, Top w5.91: U3.A3@7480.31,4173.23 7480.31,4153.54 7500,4133.86 v1(7500,4094.49)
JTAG_GPIO0: J1.6 U3.R20 | length 4306.7
  Top Layer, Top w5.91: v1(6791.34,4744.09) U3.R20@6811.02,4724.41
  Mid-Layer 3, SIG2 w5.91: J1.6@2952.76,3720.47 2992.13,3759.84 3070.87,3759.84 3208.66,3897.64 3897.64,3897.64 4015.75,4015.75 4251.97,4015.75 5000,4763.78 6771.65,4763.78 v1(6791.34,4744.09)
JTAG_GPIO1: J1.8 U3.R19 | length 4329.8
  Top Layer, Top w5.91: v1(6830.71,4744.09) U3.R19@6850.39,4724.41
  Mid-Layer 3, SIG2 w5.91: J1.8@2952.76,3799.21 2992.13,3838.58 3070.87,3838.58 3149.61,3917.32 3897.64,3917.32 4015.75,4035.43 4251.97,4035.43 5000,4783.46 6791.34,4783.46 v1(6830.71,4744.09)
MEM_A00: U3.L22 U6.29 | length 3388.3
  Top Layer, Top w5.91: v1(5866.14,2952.76) 5866.14,3897.64 6535.43,4566.93 U3.L22@6732.28,4566.93 ; U6.29@6870.08,2736.22 v1(6929.13,2736.22)
  Mid-Layer 1, SIG1 w5.91: v1(5866.14,2952.76) 5866.14,2913.39 6122.05,2657.48 6791.34,2657.48 6870.08,2736.22 v1(6929.13,2736.22)
MEM_A01: U3.L20 U6.25 | length 2358.2
  Top Layer, Top w5.91: U6.25@6102.36,2795.28 v1(6299.21,2795.28) ; v1(6791.34,4547.24) U3.L20@6811.02,4566.93
  Mid-Layer 1, SIG1 w5.91: v1(6299.21,2795.28) 6299.21,4330.71 6535.43,4566.93 6771.65,4566.93 v1(6791.34,4547.24)
MEM_A02: U3.K22 U6.24 | length 2291.3
  Top Layer, Top w5.91: U6.24@6102.36,2814.96 6062.99,2814.96 5885.83,2992.13 5885.83,3877.95 6535.43,4527.56 U3.K22@6732.28,4527.56
MEM_A03: U3.K21 U6.23 | length 2271.6
  Top Layer, Top w5.91: U6.23@6102.36,2834.65 6062.99,2834.65 5905.51,2992.13 5905.51,3858.27 6535.43,4488.19 6692.91,4488.19 6712.6,4507.87 6751.97,4507.87 U3.K21@6771.65,4527.56
MEM_A04: U3.J19 U6.22 | length 2271.4
  Top Layer, Top w5.91: U6.22@6102.36,2854.33 v1(6318.9,2854.33) ; v1(6830.71,4468.5) U3.J19@6850.39,4488.19
  Mid-Layer 1, SIG1 w5.91: v1(6318.9,2854.33) 6318.9,4271.65 6535.43,4488.19 6811.02,4488.19 v1(6830.71,4468.5)
MEM_A05: U3.H20 U6.21 | length 2184.5
  Top Layer, Top w5.91: U6.21@6102.36,2874.02 v1(6338.58,2874.02) ; v1(6791.34,4429.13) U3.H20@6811.02,4448.82
  Mid-Layer 1, SIG1 w5.91: v1(6338.58,2874.02) 6338.58,4251.97 6535.43,4448.82 6771.65,4448.82 v1(6791.34,4429.13)
MEM_A06: U3.F22 U6.20 | length 2006.1
  Top Layer, Top w5.91: U6.20@6102.36,2893.7 6062.99,2893.7 5944.88,3011.81 5944.88,3779.53 6535.43,4370.08 U3.F22@6732.28,4370.08
MEM_A07: U3.F21 U6.19 | length 1998
  Top Layer, Top w5.91: U6.19@6102.36,2913.39 6062.99,2913.39 5964.57,3011.81 5964.57,3779.53 6535.43,4350.39 6751.97,4350.39 U3.F21@6771.65,4370.08
MEM_A08: U3.K17 U6.8 | length 2033.2
  Top Layer, Top w5.91: U6.8@6102.36,3129.92 v1(6181.1,3129.92) ; v1(6909.45,4507.87) U3.K17@6929.13,4527.56
  Mid-Layer 3, SIG2 w5.91: v1(6181.1,3129.92) 6181.1,4173.23 6535.43,4527.56 6889.76,4527.56 v1(6909.45,4507.87)
MEM_A09: U3.J17 U6.7 | length 1985.6
  Top Layer, Top w5.91: U6.7@6102.36,3149.61 v1(6200.79,3149.61) ; v1(6909.45,4468.5) U3.J17@6929.13,4488.19
  Mid-Layer 3, SIG2 w5.91: v1(6200.79,3149.61) 6200.79,4153.54 6535.43,4488.19 6889.76,4488.19 v1(6909.45,4468.5)
MEM_A10: U3.E22 U6.6 | length 1704.7
  Top Layer, Top w5.91: v1(5984.25,3169.29) 5984.25,3779.53 6535.43,4330.71 U3.E22@6732.28,4330.71 ; v1(6043.31,3169.29) U6.6@6102.36,3169.29
  Mid-Layer 1, SIG1 w5.91: v1(5984.25,3169.29) v1(6043.31,3169.29)
MEM_A11: U3.E20 U6.5 | length 1769.7
  Top Layer, Top w5.91: U6.5@6102.36,3188.98 v1(6437.01,3188.98) ; v1(6791.34,4311.02) U3.E20@6811.02,4330.71
  Mid-Layer 1, SIG1 w5.91: v1(6437.01,3188.98) 6437.01,4192.91 6535.43,4291.34 6771.65,4291.34 v1(6791.34,4311.02)
MEM_A12: U3.H18 U6.4 | length 1859.4
  Top Layer, Top w5.91: U6.4@6102.36,3208.66 v1(6220.47,3208.66) ; v1(6870.08,4429.13) U3.H18@6889.76,4448.82
  Mid-Layer 3, SIG2 w5.91: v1(6220.47,3208.66) 6220.47,4133.86 6535.43,4448.82 6850.39,4448.82 v1(6870.08,4429.13)
MEM_A13: U3.H19 U6.3 | length 1841.7
  Top Layer, Top w5.91: U6.3@6102.36,3228.35 v1(6358.27,3228.35) ; v1(6830.71,4429.13) U3.H19@6850.39,4448.82
  Mid-Layer 1, SIG1 w5.91: v1(6358.27,3228.35) 6358.27,4232.28 6535.43,4409.45 6811.02,4409.45 v1(6830.71,4429.13)
MEM_A14: U3.F20 U6.2 | length 1738.5
  Top Layer, Top w5.91: U6.2@6102.36,3248.03 v1(6397.64,3248.03) ; v1(6791.34,4350.39) U3.F20@6811.02,4370.08
  Mid-Layer 1, SIG1 w5.91: v1(6397.64,3248.03) 6397.64,4212.6 6535.43,4350.39 v1(6791.34,4350.39)
MEM_A15: U3.G19 U6.1 | length 1774.5
  Top Layer, Top w5.91: U6.1@6102.36,3267.72 v1(6377.95,3267.72) ; v1(6830.71,4389.76) U3.G19@6850.39,4409.45
  Mid-Layer 1, SIG1 w5.91: v1(6377.95,3267.72) 6377.95,4212.6 6535.43,4370.08 6811.02,4370.08 v1(6830.71,4389.76)
MEM_A16: U3.C22 U6.55 | length 2196.8
  Top Layer, Top w5.91: U3.C22@6732.28,4251.97 6535.43,4251.97 6043.31,3759.84 6043.31,3307.09 6062.99,3287.4 6751.97,3287.4 6791.34,3248.03 U6.55@6870.08,3248.03
MEM_A17: U3.C20 U6.18 | length 1981.4
  Top Layer, Top w5.91: U6.18@6102.36,2933.07 v1(6496.06,2933.07) ; v1(6791.34,4232.28) U3.C20@6811.02,4251.97
  Mid-Layer 1, SIG1 w5.91: v1(6496.06,2933.07) 6496.06,4173.23 6535.43,4212.6 6771.65,4212.6 v1(6791.34,4232.28)
MEM_A18: U3.D22 U6.17 | length 1819.4
  Top Layer, Top w5.91: U6.17@6102.36,2952.76 6062.99,2952.76 6003.94,3011.81 6003.94,3759.84 6535.43,4291.34 U3.D22@6732.28,4291.34
MEM_A19: U3.D21 U6.16 | length 1811.3
  Top Layer, Top w5.91: U6.16@6102.36,2972.44 6062.99,2972.44 6023.62,3011.81 6023.62,3759.84 6535.43,4271.65 6751.97,4271.65 U3.D21@6771.65,4291.34
MEM_A20: U3.F19 U6.11 | length 1955
  Top Layer, Top w5.91: U6.11@6102.36,3070.87 v1(6417.32,3070.87) ; v1(6830.71,4350.39) U3.F19@6850.39,4370.08
  Mid-Layer 1, SIG1 w5.91: v1(6417.32,3070.87) 6417.32,4212.6 6535.43,4330.71 6811.02,4330.71 v1(6830.71,4350.39)
MEM_A21: U3.F18 U6.10 | length 1882.4
  Top Layer, Top w5.91: U6.10@6102.36,3090.55 v1(6259.84,3090.55) ; v1(6870.08,4350.39) U3.F18@6889.76,4370.08
  Mid-Layer 3, SIG2 w5.91: v1(6259.84,3090.55) 6259.84,4055.12 6535.43,4330.71 6850.39,4330.71 v1(6870.08,4350.39)
MEM_A22: U3.D20 U6.9 | length 1832.1
  Top Layer, Top w5.91: U6.9@6102.36,3110.24 v1(6456.69,3110.24) ; v1(6791.34,4271.65) U3.D20@6811.02,4291.34
  Mid-Layer 1, SIG1 w5.91: v1(6456.69,3110.24) 6456.69,4192.91 6535.43,4271.65 v1(6791.34,4271.65)
MEM_A23: U3.D19 U6.26 | length 2206.1
  Top Layer, Top w5.91: U6.26@6102.36,2775.59 v1(6476.38,2775.59) ; v1(6830.71,4271.65) U3.D19@6850.39,4291.34
  Mid-Layer 1, SIG1 w5.91: v1(6476.38,2775.59) 6476.38,4192.91 6535.43,4251.97 6811.02,4251.97 v1(6830.71,4271.65)
MEM_A24: U3.B20 U6.27 | length 2119.2
  Top Layer, Top w5.91: U6.27@6102.36,2755.91 v1(6496.06,2755.91) ; v1(6791.34,4192.91) U3.B20@6811.02,4212.6
  Mid-Layer 1, SIG1 w5.91: v1(6496.06,2755.91) 6515.75,2775.59 6515.75,4153.54 6535.43,4173.23 6771.65,4173.23 v1(6791.34,4192.91)
MEM_D00: U3.AA20 U6.34 | length 5302.5
  Top Layer, Top w5.91: v1(6791.34,5019.69) 6791.34,4980.31 U3.AA20@6811.02,4960.63 ; U6.34@6870.08,2834.65 v1(7244.09,2834.65)
  Mid-Layer 4, SIG4 w5.91: v1(6791.34,5019.69) 6791.34,5236.22 7086.61,5531.5 7834.65,5531.5 8149.61,5216.54 8149.61,3996.06 7795.28,3641.73 7322.83,3641.73 7244.09,3562.99 v1(7244.09,2834.65)
MEM_D01: U3.U14 U6.36 | length 4989.5
  Top Layer, Top w5.91: U6.36@6870.08,2874.02 v1(7165.35,2874.02) ; v1(7027.56,4822.83) U3.U14@7047.24,4803.15
  Mid-Layer 4, SIG4 w5.91: v1(7027.56,4822.83) 7007.87,4842.52 7007.87,5236.22 7224.41,5452.76 7834.65,5452.76 8070.87,5216.54 8070.87,3996.06 7795.28,3720.47 7322.83,3720.47 7165.35,3562.99 v1(7165.35,2874.02)
MEM_D02: U3.U13 U6.39 | length 4835.4
  Top Layer, Top w5.91: U6.39@6870.08,2933.07 v1(7145.67,2933.07) ; v1(7066.93,4822.83) U3.U13@7086.61,4803.15
  Mid-Layer 4, SIG4 w5.91: v1(7066.93,4822.83) 7047.24,4842.52 7047.24,5236.22 7244.09,5433.07 7834.65,5433.07 8051.18,5216.54 8051.18,3996.06 7795.28,3740.16 7322.83,3740.16 7145.67,3562.99 v1(7145.67,2933.07)
MEM_D03: U3.AA6 U6.41 | length 3938.6
  Top Layer, Top w5.91: U6.41@6870.08,2972.44 v1(7027.56,2972.44) ; U3.AA6@7362.2,4960.63 7381.89,4980.31 v1(7381.89,5177.17)
  Mid-Layer 4, SIG4 w5.91: v1(7027.56,2972.44) 7027.56,3562.99 7322.83,3858.27 7795.28,3858.27 7933.07,3996.06 7933.07,5216.54 7834.65,5314.96 7500,5314.96 7421.26,5236.22 7421.26,5216.54 v1(7381.89,5177.17)
MEM_D04: U3.AB6 U6.47 | length 3848.4
  Top Layer, Top w5.91: U6.47@6870.08,3090.55 v1(7047.24,3090.55) ; U3.AB6@7362.2,5000 7362.2,5196.85 v1(7381.89,5216.54)
  Mid-Layer 4, SIG4 w5.91: v1(7047.24,3090.55) 7047.24,3562.99 7322.83,3838.58 7795.28,3838.58 7952.76,3996.06 7952.76,5216.54 7834.65,5334.65 7500,5334.65 v1(7381.89,5216.54)
MEM_D05: U3.W4 U6.49 | length 3681.3
  Top Layer, Top w5.91: U6.49@6870.08,3129.92 v1(6988.19,3129.92) ; U3.W4@7440.94,4881.89 v1(7460.63,4901.57)
  Mid-Layer 4, SIG4 w5.91: v1(6988.19,3129.92) 6988.19,3562.99 7322.83,3897.64 7795.28,3897.64 7893.7,3996.06 7893.7,5216.54 7834.65,5275.59 7519.69,5275.59 7480.31,5236.22 7480.31,4921.26 v1(7460.63,4901.57)
MEM_D06: U3.Y4 U6.51 | length 3697.7
  Top Layer, Top w5.91: U6.51@6870.08,3169.29 v1(7007.87,3169.29) ; U3.Y4@7440.94,4921.26 v1(7460.63,4940.94)
  Mid-Layer 4, SIG4 w5.91: v1(7007.87,3169.29) 7007.87,3562.99 7322.83,3877.95 7795.28,3877.95 7913.39,3996.06 7913.39,5216.54 7834.65,5295.28 7500,5295.28 7440.94,5236.22 7440.94,4960.63 v1(7460.63,4940.94)
MEM_D07: U3.Y7 U6.53 | length 3927.1
  Top Layer, Top w5.91: U6.53@6870.08,3208.66 v1(7066.93,3208.66) ; U3.Y7@7322.83,4921.26 v1(7342.52,4940.94)
  Mid-Layer 4, SIG4 w5.91: v1(7066.93,3208.66) 7066.93,3562.99 7322.83,3818.9 7795.28,3818.9 7972.44,3996.06 7972.44,5216.54 7834.65,5354.33 7440.94,5354.33 7362.2,5275.59 7362.2,4960.63 v1(7342.52,4940.94)
MEM_D08: U3.AA2 U6.35 | length 3248.3
  Top Layer, Top w5.91: U6.35@6870.08,2854.33 v1(6948.82,2854.33) ; U3.AA2@7519.69,4960.63 7539.37,4980.31 v1(7539.37,5019.69)
  Mid-Layer 4, SIG4 w5.91: v1(6948.82,2854.33) 6948.82,3562.99 7322.83,3937.01 7795.28,3937.01 7854.33,3996.06 7854.33,4940.94 7755.91,5039.37 7559.06,5039.37 v1(7539.37,5019.69)
MEM_D09: U3.AB2 U6.37 | length 3676.6
  Top Layer, Top w5.91: U6.37@6870.08,2893.7 v1(6968.5,2893.7) ; U3.AB2@7519.69,5000 7519.69,5196.85 v1(7539.37,5216.54)
  Mid-Layer 4, SIG4 w5.91: v1(6968.5,2893.7) 6968.5,3562.99 7322.83,3917.32 7795.28,3917.32 7874.02,3996.06 7874.02,5216.54 7834.65,5255.91 7559.06,5255.91 7539.37,5236.22 v1(7539.37,5216.54)
MEM_D10: U3.V15 U6.40 | length 4966.5
  Top Layer, Top w5.91: U6.40@6870.08,2952.76 v1(7185.04,2952.76) ; v1(6988.19,4862.2) U3.V15@7007.87,4842.52
  Mid-Layer 4, SIG4 w5.91: v1(6988.19,4862.2) 6968.5,4881.89 6968.5,5236.22 7204.72,5472.44 7834.65,5472.44 8090.55,5216.54 8090.55,3996.06 7795.28,3700.79 7322.83,3700.79 7185.04,3562.99 v1(7185.04,2952.76)
MEM_D11: U3.AA18 U6.42 | length 5038.5
  Top Layer, Top w5.91: U6.42@6870.08,2992.13 v1(7224.41,2992.13) ; v1(6870.08,5177.17) 6870.08,4980.31 U3.AA18@6889.76,4960.63
  Mid-Layer 4, SIG4 w5.91: v1(6870.08,5177.17) 6850.39,5196.85 6850.39,5236.22 7125.98,5511.81 7834.65,5511.81 8129.92,5216.54 8129.92,3996.06 7795.28,3661.42 7322.83,3661.42 7224.41,3562.99 v1(7224.41,2992.13)
MEM_D12: U3.AB18 U6.48 | length 4797.5
  Top Layer, Top w5.91: U6.48@6870.08,3110.24 v1(7204.72,3110.24) ; v1(6870.08,5216.54) 6889.76,5196.85 U3.AB18@6889.76,5000
  Mid-Layer 4, SIG4 w5.91: v1(6870.08,5216.54) 6870.08,5236.22 7125.98,5492.13 7834.65,5492.13 8110.24,5216.54 8110.24,3996.06 7795.28,3681.1 7322.83,3681.1 7204.72,3562.99 v1(7204.72,3110.24)
MEM_D13: U3.Y13 U6.50 | length 4405.7
  Top Layer, Top w5.91: U6.50@6870.08,3149.61 v1(7125.98,3149.61) ; v1(7066.93,4940.94) U3.Y13@7086.61,4921.26
  Mid-Layer 4, SIG4 w5.91: v1(7066.93,4940.94) 7086.61,4960.63 7086.61,5236.22 7263.78,5413.39 7834.65,5413.39 8031.5,5216.54 8031.5,3996.06 7795.28,3759.84 7322.83,3759.84 7125.98,3562.99 v1(7125.98,3149.61)
MEM_D14: U3.AA12 U6.52 | length 4220.4
  Top Layer, Top w5.91: U6.52@6870.08,3188.98 v1(7106.3,3188.98) ; U3.AA12@7125.98,4960.63 7106.3,4980.31 7106.3,5177.17 v1(7145.67,5216.54)
  Mid-Layer 4, SIG4 w5.91: v1(7106.3,3188.98) 7106.3,3562.99 7322.83,3779.53 7795.28,3779.53 8011.81,3996.06 8011.81,5216.54 7834.65,5393.7 7303.15,5393.7 7145.67,5236.22 v1(7145.67,5216.54)
MEM_D15: U3.AB12 U6.54 | length 4058.2
  Top Layer, Top w5.91: U6.54@6870.08,3228.35 v1(7086.61,3228.35) ; U3.AB12@7125.98,5000 7125.98,5157.48 v1(7145.67,5177.17)
  Mid-Layer 4, SIG4 w5.91: v1(7086.61,3228.35) 7086.61,3562.99 7322.83,3799.21 7795.28,3799.21 7992.13,3996.06 7992.13,5216.54 7834.65,5374.02 7303.15,5374.02 7165.35,5236.22 7165.35,5196.85 v1(7145.67,5177.17)
MEZ_5V: J2.a1 J2.b1 J3.a1 J3.b1 J4.a25 J5.a25 JP2.2 | length 7030.7
  Top Layer, Top w5.91: J2.a1@6600,2288.23 v1(6600,2337.5) ; v1(6600,2456.25) J2.b1@6600,2504.77 ; J4.a25@7800,5595.23 v1(7800,5643.75)
  Top Layer, Top w39.37: v1(5075,2200) v1(5075,2250) JP2.2@5075,2306.25
  Mid-Layer 2, SIG3 w39.37: v1(5075,2200) 5075,2225 ; v1(5075,2250) 5075,2225 ; v1(6600,2456.25) v1(6600,2337.5) 6600,2244.09 ; v1(7800,5643.75) 7800,5448.03 7992.13,5255.91 7992.13,2303.15 7933.07,2244.09 6600,2244.09 ; 5075,2225 5125,2225 5144.09,2244.09 6600,2244.09
  Bottom Layer, Bottom w5.91: J3.a1@6600,2288.23 v1(6600,2337.5) ; v1(6600,2456.25) J3.b1@6600,2504.77 ; J5.a25@7800,5595.23 v1(7800,5643.75)
MEZ_12MHZ: J2.b25 J3.b25 U3.C11 | length 2171.9
  Top Layer, Top w5.91: U3.C11@7165.35,4251.97 v1(7185.04,4232.28) ; v1(7800,2456.25) J2.b25@7800,2504.77
  Mid-Layer 3, SIG2 w5.91: v1(7185.04,4232.28) 7165.35,4212.6 7165.35,3956.69 7610.24,3511.81 7610.24,2664.76 7800,2475 v1(7800,2456.25)
  Bottom Layer, Bottom w5.91: v1(7800,2456.25) J3.b25@7800,2504.77
MEZ_24MHZ: J4.b25 J5.b25 U3.M20 | length 2143.6
  Top Layer, Top w5.91: v1(6791.34,4625.98) U3.M20@6811.02,4606.3 ; v1(7800,5762.5) J4.b25@7800,5811.77
  Mid-Layer 4, SIG4 w5.91: v1(6791.34,4625.98) 6771.65,4645.67 6771.65,5236.22 7086.61,5551.18 7813.68,5551.18 7825,5562.5 7825,5737.5 v1(7800,5762.5)
  Bottom Layer, Bottom w5.91: v1(7800,5762.5) J5.b25@7800,5811.77
MEZ_A00: J2.a2 J3.a2 U3.K18 | length 3665.9
  Top Layer, Top w5.91: J2.a2@6650,2288.23 v1(6650,2337.5) ; v1(6870.08,4507.87) U3.K18@6889.76,4527.56
  Mid-Layer 2, SIG3 w5.91: v1(6650,2337.5) 6675,2362.5 6675,2475 6650,2500 6161.42,2500 5748.03,2913.39 5748.03,3740.16 6535.43,4527.56 6850.39,4527.56 v1(6870.08,4507.87)
  Bottom Layer, Bottom w5.91: J3.a2@6650,2288.23 v1(6650,2337.5)
MEZ_A01: J2.b2 J3.b2 U3.A15 U7.23 | length 2798.9
  Top Layer, Top w5.91: v1(6650,2456.25) J2.b2@6650,2504.77 ; U3.A15@7007.87,4173.23 7007.87,3956.69 7303.15,3661.42 7421.26,3661.42 7488.19,3594.49 7488.19,2901.57 7437.01,2850.39 v1(7421.26,2850.39) U7.23@7322.83,2850.39
  Mid-Layer 1, SIG1 w5.91: v1(6650,2456.25) 6650,2475 6832.48,2657.48 7263.78,2657.48 7366.14,2759.84 7366.14,2811.02 7405.51,2850.39 v1(7421.26,2850.39)
  Bottom Layer, Bottom w5.91: v1(6650,2456.25) J3.b2@6650,2504.77
MEZ_A02: J2.a3 J3.a3 U3.D14 U7.24 | length 3071.7
  Top Layer, Top w5.91: J2.a3@6700,2288.23 v1(6700,2337.5) ; v1(7027.56,4271.65) U3.D14@7047.24,4291.34 ; U7.24@7322.83,2818.9 v1(7421.26,2818.9)
  Mid-Layer 1, SIG1 w5.91: v1(6700,2337.5) 6675,2362.5 6675,2475 6837.8,2637.8 7263.78,2637.8 7377.95,2751.97 7377.95,2791.34 7405.51,2818.9 v1(7421.26,2818.9) 7437.01,2818.9 7500,2881.89 7500,3602.36 7421.26,3681.1 7283.46,3681.1 7007.87,3956.69 7007.87,4251.97 v1(7027.56,4271.65)
  Bottom Layer, Bottom w5.91: J3.a3@6700,2288.23 v1(6700,2337.5)
MEZ_A03: J2.b3 J3.b3 U3.C14 U7.25 | length 2881.8
  Top Layer, Top w5.91: v1(6700,2456.25) J2.b3@6700,2504.77 ; v1(7027.56,4232.28) U3.C14@7047.24,4251.97 ; U7.25@7322.83,2787.4 v1(7421.26,2787.4)
  Mid-Layer 1, SIG1 w5.91: v1(6700,2456.25) 6700,2475 6843.11,2618.11 7263.78,2618.11 7389.76,2744.09 7389.76,2771.65 7405.51,2787.4 v1(7421.26,2787.4) 7437.01,2787.4 7511.81,2862.2 7511.81,3610.24 7421.26,3700.79 7283.46,3700.79 7027.56,3956.69 v1(7027.56,4232.28)
  Bottom Layer, Bottom w5.91: v1(6700,2456.25) J3.b3@6700,2504.77
MEZ_A04: J2.a4 J3.a4 U3.B14 U7.26 | length 2938.2
  Top Layer, Top w5.91: J2.a4@6750,2288.23 v1(6750,2337.5) ; U3.B14@7047.24,4212.6 7027.56,4192.91 7027.56,3956.69 7303.15,3681.1 7421.26,3681.1 7500,3602.36 7500,2818.9 7437.01,2755.91 v1(7421.26,2755.91) U7.26@7322.83,2755.91
  Mid-Layer 1, SIG1 w5.91: v1(6750,2337.5) 6725,2362.5 6725,2475 6848.43,2598.43 7263.78,2598.43 7401.57,2736.22 7401.57,2751.97 7405.51,2755.91 v1(7421.26,2755.91)
  Bottom Layer, Bottom w5.91: J3.a4@6750,2288.23 v1(6750,2337.5)
MEZ_A05: J2.b4 J3.b4 U3.A14 U7.29 | length 3025.9
  Top Layer, Top w5.91: v1(6750,2456.25) J2.b4@6750,2504.77 ; U3.A14@7047.24,4173.23 7047.24,3956.69 7303.15,3700.79 7421.26,3700.79 7539.37,3582.68 7539.37,2877.95 7661.42,2755.91 v1(7677.17,2755.91) U7.29@7775.59,2755.91
  Mid-Layer 1, SIG1 w5.91: v1(6750,2456.25) 6750,2475 6853.74,2578.74 7519.69,2578.74 7677.17,2736.22 v1(7677.17,2755.91)
  Bottom Layer, Bottom w5.91: v1(6750,2456.25) J3.b4@6750,2504.77
MEZ_A06: J2.a5 J3.a5 U3.A13 U7.30 | length 3140.7
  Top Layer, Top w5.91: J2.a5@6800,2288.23 v1(6800,2337.5) ; U3.A13@7086.61,4173.23 7086.61,3956.69 7322.83,3720.47 7421.26,3720.47 7551.18,3590.55 7551.18,2897.64 7661.42,2787.4 v1(7677.17,2787.4) U7.30@7775.59,2787.4
  Mid-Layer 1, SIG1 w5.91: v1(6800,2337.5) 6775,2362.5 6775,2475 6859.06,2559.06 7519.69,2559.06 7696.85,2736.22 7696.85,2783.46 7692.91,2787.4 v1(7677.17,2787.4)
  Bottom Layer, Bottom w5.91: J3.a5@6800,2288.23 v1(6800,2337.5)
MEZ_A07: J2.b5 J3.b5 U3.C13 U7.31 | length 3085.2
  Top Layer, Top w5.91: v1(6800,2456.25) J2.b5@6800,2504.77 ; U3.C13@7086.61,4251.97 7106.3,4232.28 7106.3,3956.69 7322.83,3740.16 7421.26,3740.16 7562.99,3598.43 7562.99,2917.32 7661.42,2818.9 v1(7677.17,2818.9) U7.31@7775.59,2818.9
  Mid-Layer 1, SIG1 w5.91: v1(6800,2456.25) 6800,2475 6864.37,2539.37 7519.69,2539.37 7708.66,2728.35 7708.66,2803.15 7692.91,2818.9 v1(7677.17,2818.9)
  Bottom Layer, Bottom w5.91: v1(6800,2456.25) J3.b5@6800,2504.77
MEZ_A08: J2.a6 J3.a6 U3.A12 U7.32 | length 3117.1
  Top Layer, Top w5.91: J2.a6@6850,2288.23 v1(6850,2337.5) ; U3.A12@7125.98,4173.23 7125.98,3956.69 7322.83,3759.84 7421.26,3759.84 7574.8,3606.3 7574.8,2937.01 7661.42,2850.39 v1(7677.17,2850.39) U7.32@7775.59,2850.39
  Mid-Layer 1, SIG1 w5.91: v1(6850,2337.5) 6825,2362.5 6825,2475 6869.69,2519.68 7519.69,2519.68 7720.47,2720.47 7720.47,2822.83 7692.91,2850.39 v1(7677.17,2850.39)
  Bottom Layer, Bottom w5.91: J3.a6@6850,2288.23 v1(6850,2337.5)
MEZ_A09: J2.b6 J3.b6 U3.B12 U7.33 | length 3010.6
  Top Layer, Top w5.91: v1(6850,2456.25) J2.b6@6850,2504.77 ; U3.B12@7125.98,4212.6 7145.67,4192.91 7145.67,4153.54 7165.35,4133.86 7165.35,3956.69 7342.52,3779.53 7421.26,3779.53 7586.61,3614.17 7586.61,2956.69 7661.42,2881.89 v1(7677.17,2881.89) U7.33@7775.59,2881.89
  Mid-Layer 1, SIG1 w5.91: v1(6850,2456.25) 6850,2475 6875,2500 7519.69,2500 7732.28,2712.6 7732.28,2842.52 7692.91,2881.89 v1(7677.17,2881.89)
  Bottom Layer, Bottom w5.91: v1(6850,2456.25) J3.b6@6850,2504.77
MEZ_A10: J4.a18 J5.a18 U3.D11 U7.34 | length 5316.7
  Top Layer, Top w5.91: U3.D11@7165.35,4291.34 v1(7185.04,4271.65) ; J4.a18@7450,5595.23 v1(7450,5643.75) ; v1(7677.17,2913.39) U7.34@7775.59,2913.39
  Mid-Layer 2, SIG3 w5.91: v1(7450,5643.75) 7450,5562.5 7854.33,5158.17 7854.33,2716.54 7834.65,2696.85 7677.17,2696.85 7657.48,2716.54 7657.48,2909.45 7661.42,2913.39 v1(7677.17,2913.39)
  Mid-Layer 3, SIG2 w5.91: v1(7185.04,4271.65) 7204.72,4251.97 7204.72,3956.69 7622.05,3539.37 7622.05,2952.76 7661.42,2913.39 v1(7677.17,2913.39)
  Bottom Layer, Bottom w5.91: J5.a18@7450,5595.23 v1(7450,5643.75)
MEZ_A11: J4.b18 J5.b18 U3.C15 U7.22 | length 6123.8
  Top Layer, Top w5.91: v1(6988.19,4232.28) U3.C15@7007.87,4251.97 ; U7.22@7322.83,2881.89 v1(7421.26,2881.89) ; v1(7450,5762.5) J4.b18@7450,5811.77
  Mid-Layer 1, SIG1 w5.91: v1(6988.19,4232.28) 6968.5,4212.6 6968.5,3956.69 7263.78,3661.42 7421.26,3661.42 7488.19,3594.49 7488.19,2933.07 7437.01,2881.89 v1(7421.26,2881.89)
  Mid-Layer 2, SIG3 w5.91: v1(7421.26,2881.89) 7437.01,2881.89 7440.94,2877.95 7440.94,2696.85 7539.37,2598.43 7834.65,2598.43 7952.76,2716.54 7952.76,5234.74 7625,5562.5 7625,5775 7612.5,5787.5 7462.5,5787.5 7450,5775 v1(7450,5762.5)
  Bottom Layer, Bottom w5.91: v1(7450,5762.5) J5.b18@7450,5811.77
MEZ_A12: J4.a19 J5.a19 U3.A11 U7.35 | length 5289.5
  Top Layer, Top w5.91: U3.A11@7165.35,4173.23 7165.35,4153.54 7185.04,4133.86 7185.04,3956.69 7342.52,3799.21 7421.26,3799.21 7598.43,3622.05 7598.43,3007.87 7661.42,2944.88 v1(7677.17,2944.88) U7.35@7775.59,2944.88 ; J4.a19@7500,5595.23 v1(7500,5643.75)
  Mid-Layer 2, SIG3 w5.91: v1(7500,5643.75) 7500,5562.5 7874.02,5188.48 7874.02,2716.54 7834.65,2677.17 7677.17,2677.17 7645.67,2708.66 7645.67,2929.13 7661.42,2944.88 v1(7677.17,2944.88)
  Bottom Layer, Bottom w5.91: J5.a19@7500,5595.23 v1(7500,5643.75)
MEZ_A13: J4.b19 J5.b19 U3.C10 U7.36 | length 5491.5
  Top Layer, Top w5.91: U3.C10@7204.72,4251.97 v1(7224.41,4232.28) ; v1(7500,5762.5) J4.b19@7500,5811.77 ; v1(7677.17,2976.38) U7.36@7775.59,2976.38
  Mid-Layer 1, SIG1 w5.91: v1(7224.41,4232.28) 7244.09,4212.6 7244.09,3956.69 7633.86,3566.93 7633.86,3003.94 7661.42,2976.38 v1(7677.17,2976.38)
  Mid-Layer 2, SIG3 w5.91: v1(7500,5762.5) 7525,5737.5 7525,5562.5 7893.7,5193.8 7893.7,2716.54 7834.65,2657.48 7677.17,2657.48 7633.86,2700.79 7633.86,2948.82 7661.42,2976.38 v1(7677.17,2976.38)
  Bottom Layer, Bottom w5.91: v1(7500,5762.5) J5.b19@7500,5811.77
MEZ_A14: J4.a20 J5.a20 U3.A16 U7.20 | length 5596.5
  Top Layer, Top w5.91: U3.A16@6968.5,4173.23 6968.5,3956.69 7283.46,3641.73 7421.26,3641.73 7476.38,3586.61 7476.38,2984.25 7437.01,2944.88 v1(7421.26,2944.88) U7.20@7322.83,2944.88 ; J4.a20@7550,5595.23 v1(7550,5643.75)
  Mid-Layer 2, SIG3 w5.91: v1(7421.26,2944.88) 7437.01,2944.88 7464.57,2917.32 7464.57,2712.6 7539.37,2637.8 7834.65,2637.8 7913.39,2716.54 7913.39,5199.11 7550,5562.5 v1(7550,5643.75)
  Bottom Layer, Bottom w5.91: J5.a20@7550,5595.23 v1(7550,5643.75)
MEZ_A15: J4.b20 J5.b20 U3.D15 U7.21 | length 5803.6
  Top Layer, Top w5.91: v1(6988.19,4271.65) U3.D15@7007.87,4291.34 ; U7.21@7322.83,2913.39 v1(7421.26,2913.39) ; v1(7550,5762.5) J4.b20@7550,5811.77
  Mid-Layer 2, SIG3 w5.91: v1(7421.26,2913.39) 7437.01,2913.39 7452.76,2897.64 7452.76,2704.72 7539.37,2618.11 7834.65,2618.11 7933.07,2716.54 7933.07,5204.43 7575,5562.5 7575,5737.5 v1(7550,5762.5)
  Mid-Layer 3, SIG2 w5.91: v1(6988.19,4271.65) 7007.87,4251.97 7007.87,3956.69 7381.89,3582.68 7421.26,3582.68 7440.94,3562.99 7440.94,2917.32 7437.01,2913.39 v1(7421.26,2913.39)
  Bottom Layer, Bottom w5.91: v1(7550,5762.5) J5.b20@7550,5811.77
MEZ_A16: J4.a21 J5.a21 U3.R7 | length 1082.7
  Top Layer, Top w5.91: U3.R7@7322.83,4724.41 v1(7342.52,4744.09) ; v1(7381.89,5255.91) 7381.89,5275.59 7600,5493.7 J4.a21@7600,5595.23 v1(7600,5643.75)
  Mid-Layer 2, SIG3 w5.91: v1(7342.52,4744.09) 7362.2,4763.78 7362.2,5236.22 v1(7381.89,5255.91)
  Bottom Layer, Bottom w5.91: J5.a21@7600,5595.23 v1(7600,5643.75)
MEZ_A17: J4.b21 J5.b21 U3.T7 | length 1232.8
  Top Layer, Top w5.91: U3.T7@7322.83,4763.78 v1(7342.52,4783.46) ; v1(7600,5762.5) J4.b21@7600,5811.77
  Mid-Layer 3, SIG2 w5.91: v1(7342.52,4783.46) 7362.2,4803.15 7362.2,5275.59 7625,5538.39 7625,5737.5 v1(7600,5762.5)
  Bottom Layer, Bottom w5.91: v1(7600,5762.5) J5.b21@7600,5811.77
MEZ_A18: J4.a22 J5.a22 U3.U6 | length 1056.8
  Top Layer, Top w5.91: U3.U6@7362.2,4803.15 v1(7381.89,4822.83) ; J4.a22@7650,5595.23 v1(7650,5643.75)
  Mid-Layer 1, SIG1 w5.91: v1(7381.89,4822.83) 7401.57,4842.52 7401.57,5236.22 7650,5484.65 v1(7650,5643.75)
  Bottom Layer, Bottom w5.91: J5.a22@7650,5595.23 v1(7650,5643.75)
MEZ_A19: J4.b22 J5.b22 U3.V5 | length 1142.1
  Top Layer, Top w5.91: U3.V5@7401.57,4842.52 v1(7421.26,4862.2) ; v1(7650,5762.5) J4.b22@7650,5811.77
  Mid-Layer 1, SIG1 w5.91: v1(7421.26,4862.2) 7440.94,4881.89 7440.94,5236.22 7675,5470.28 7675,5737.5 v1(7650,5762.5)
  Bottom Layer, Bottom w5.91: v1(7650,5762.5) J5.b22@7650,5811.77
MEZ_A20: J4.a23 J5.a23 U3.AB4 | length 815.9
  Top Layer, Top w5.91: U3.AB4@7440.94,5000 7440.94,5019.69 7421.26,5039.37 7421.26,5236.22 7700,5514.96 J4.a23@7700,5595.23 v1(7700,5643.75)
  Bottom Layer, Bottom w5.91: J5.a23@7700,5595.23 v1(7700,5643.75)
MEZ_A21: J4.b23 J5.b23 U3.AA4 | length 1044.7
  Top Layer, Top w5.91: U3.AA4@7440.94,4960.63 7460.63,4980.31 7460.63,5019.69 7440.94,5039.37 7440.94,5236.22 7725,5520.28 7725,5737.5 v1(7700,5762.5) J4.b23@7700,5811.77
  Bottom Layer, Bottom w5.91: v1(7700,5762.5) J5.b23@7700,5811.77
MEZ_A22: J4.a24 J5.a24 U3.AB3 | length 804
  Top Layer, Top w5.91: U3.AB3@7480.31,5000 7480.31,5236.22 7750,5505.91 J4.a24@7750,5595.23 v1(7750,5643.75)
  Bottom Layer, Bottom w5.91: J5.a24@7750,5595.23 v1(7750,5643.75)
MEZ_A23: J4.b24 J5.b24 U3.Y3 | length 1072.2
  Top Layer, Top w5.91: U3.Y3@7480.31,4921.26 v1(7500,4940.94) ; v1(7750,5762.5) J4.b24@7750,5811.77
  Mid-Layer 1, SIG1 w5.91: v1(7500,4940.94) 7519.69,4960.63 7519.69,5236.22 7775,5491.54 7775,5737.5 v1(7750,5762.5)
  Bottom Layer, Bottom w5.91: v1(7750,5762.5) J5.b24@7750,5811.77
MEZ_D00: J2.a11 J3.a11 U3.A21 U7.2 | length 2679.6
  Top Layer, Top w5.91: v1(6751.97,4153.54) U3.A21@6771.65,4173.23 ; J2.a11@7100,2288.23 v1(7100,2337.5) ; U7.2@7322.83,3511.81 v1(7421.26,3511.81)
  Mid-Layer 2, SIG3 w5.91: v1(6751.97,4153.54) 6751.97,3956.69 7125.98,3582.68 7421.26,3582.68 7440.94,3562.99 7440.94,3515.75 7437.01,3511.81 v1(7421.26,3511.81)
  Mid-Layer 4, SIG4 w5.91: v1(7100,2337.5) 7075,2362.5 7075,2475 7318.9,2718.9 7318.9,3425.2 7405.51,3511.81 v1(7421.26,3511.81)
  Bottom Layer, Bottom w5.91: J3.a11@7100,2288.23 v1(7100,2337.5)
MEZ_D01: J2.b11 J3.b11 U3.B21 U7.4 | length 2587.8
  Top Layer, Top w5.91: v1(6751.97,4192.91) U3.B21@6771.65,4212.6 ; v1(7100,2456.25) J2.b11@7100,2504.77 ; U7.4@7322.83,3448.82 v1(7421.26,3448.82)
  Mid-Layer 2, SIG3 w5.91: v1(6751.97,4192.91) 6771.65,4173.23 6771.65,3956.69 7125.98,3602.36 7421.26,3602.36 7452.76,3570.87 7452.76,3464.57 7437.01,3448.82 v1(7421.26,3448.82)
  Mid-Layer 4, SIG4 w5.91: v1(7100,2456.25) 7100,2475 7330.71,2705.71 7330.71,3374.02 7405.51,3448.82 v1(7421.26,3448.82)
  Bottom Layer, Bottom w5.91: v1(7100,2456.25) J3.b11@7100,2504.77